# Altium PCB Flyback.PcbDoc (part 1 of 2)
Units mm, origin at the board's own origin, x right, y up, seen from the top; angles counter-clockwise.
Board outline 152.4 x 101.6 mm, 2 copper layers (Top Layer, Bottom Layer), stack 1.671 mm thick; 41 components, 28 nets, 118 pads, 0 vias.
Unrouted connection lines stored in the file: 75.
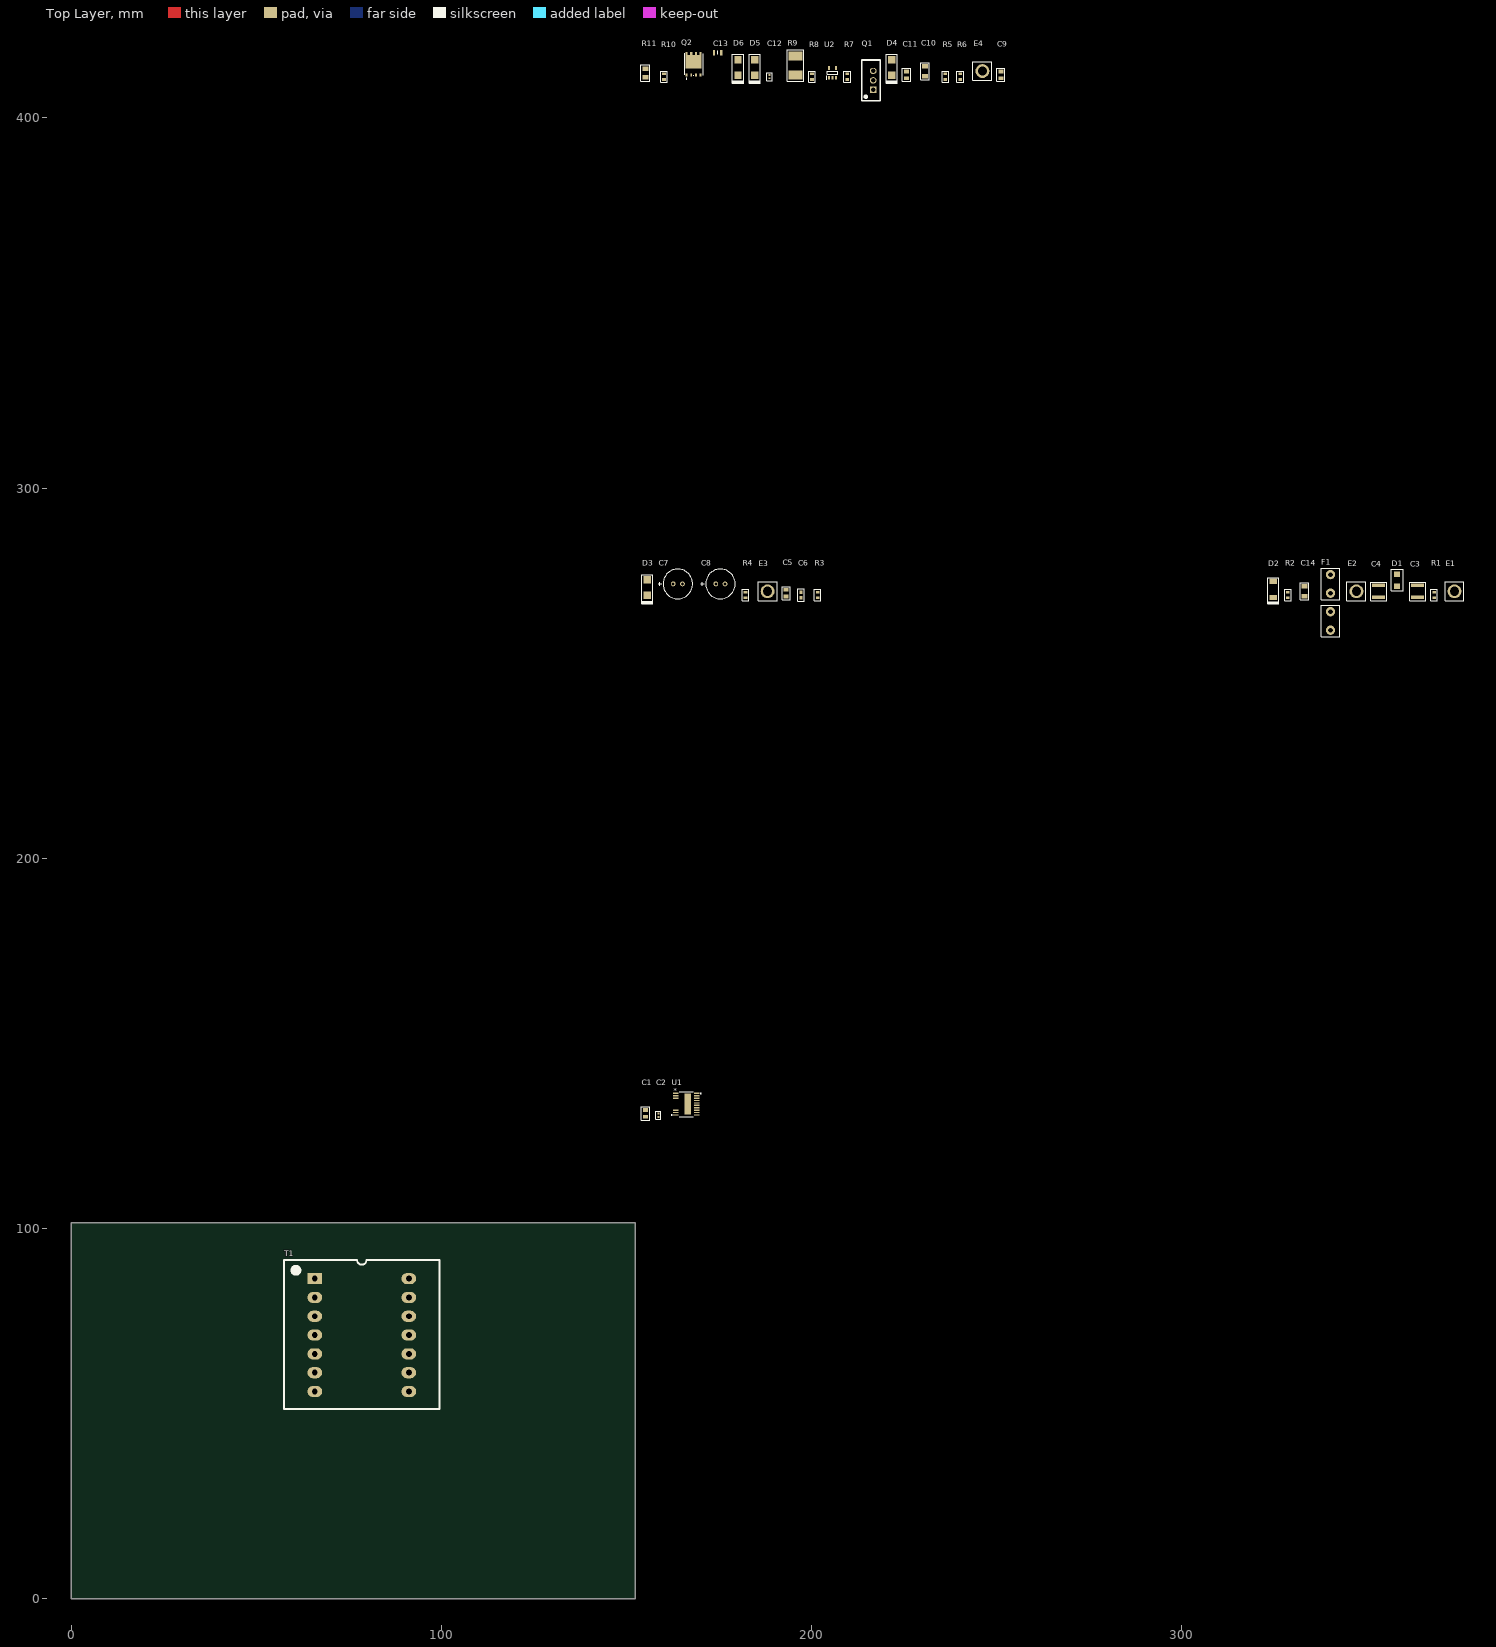
[diagram p0: Top Layer view]
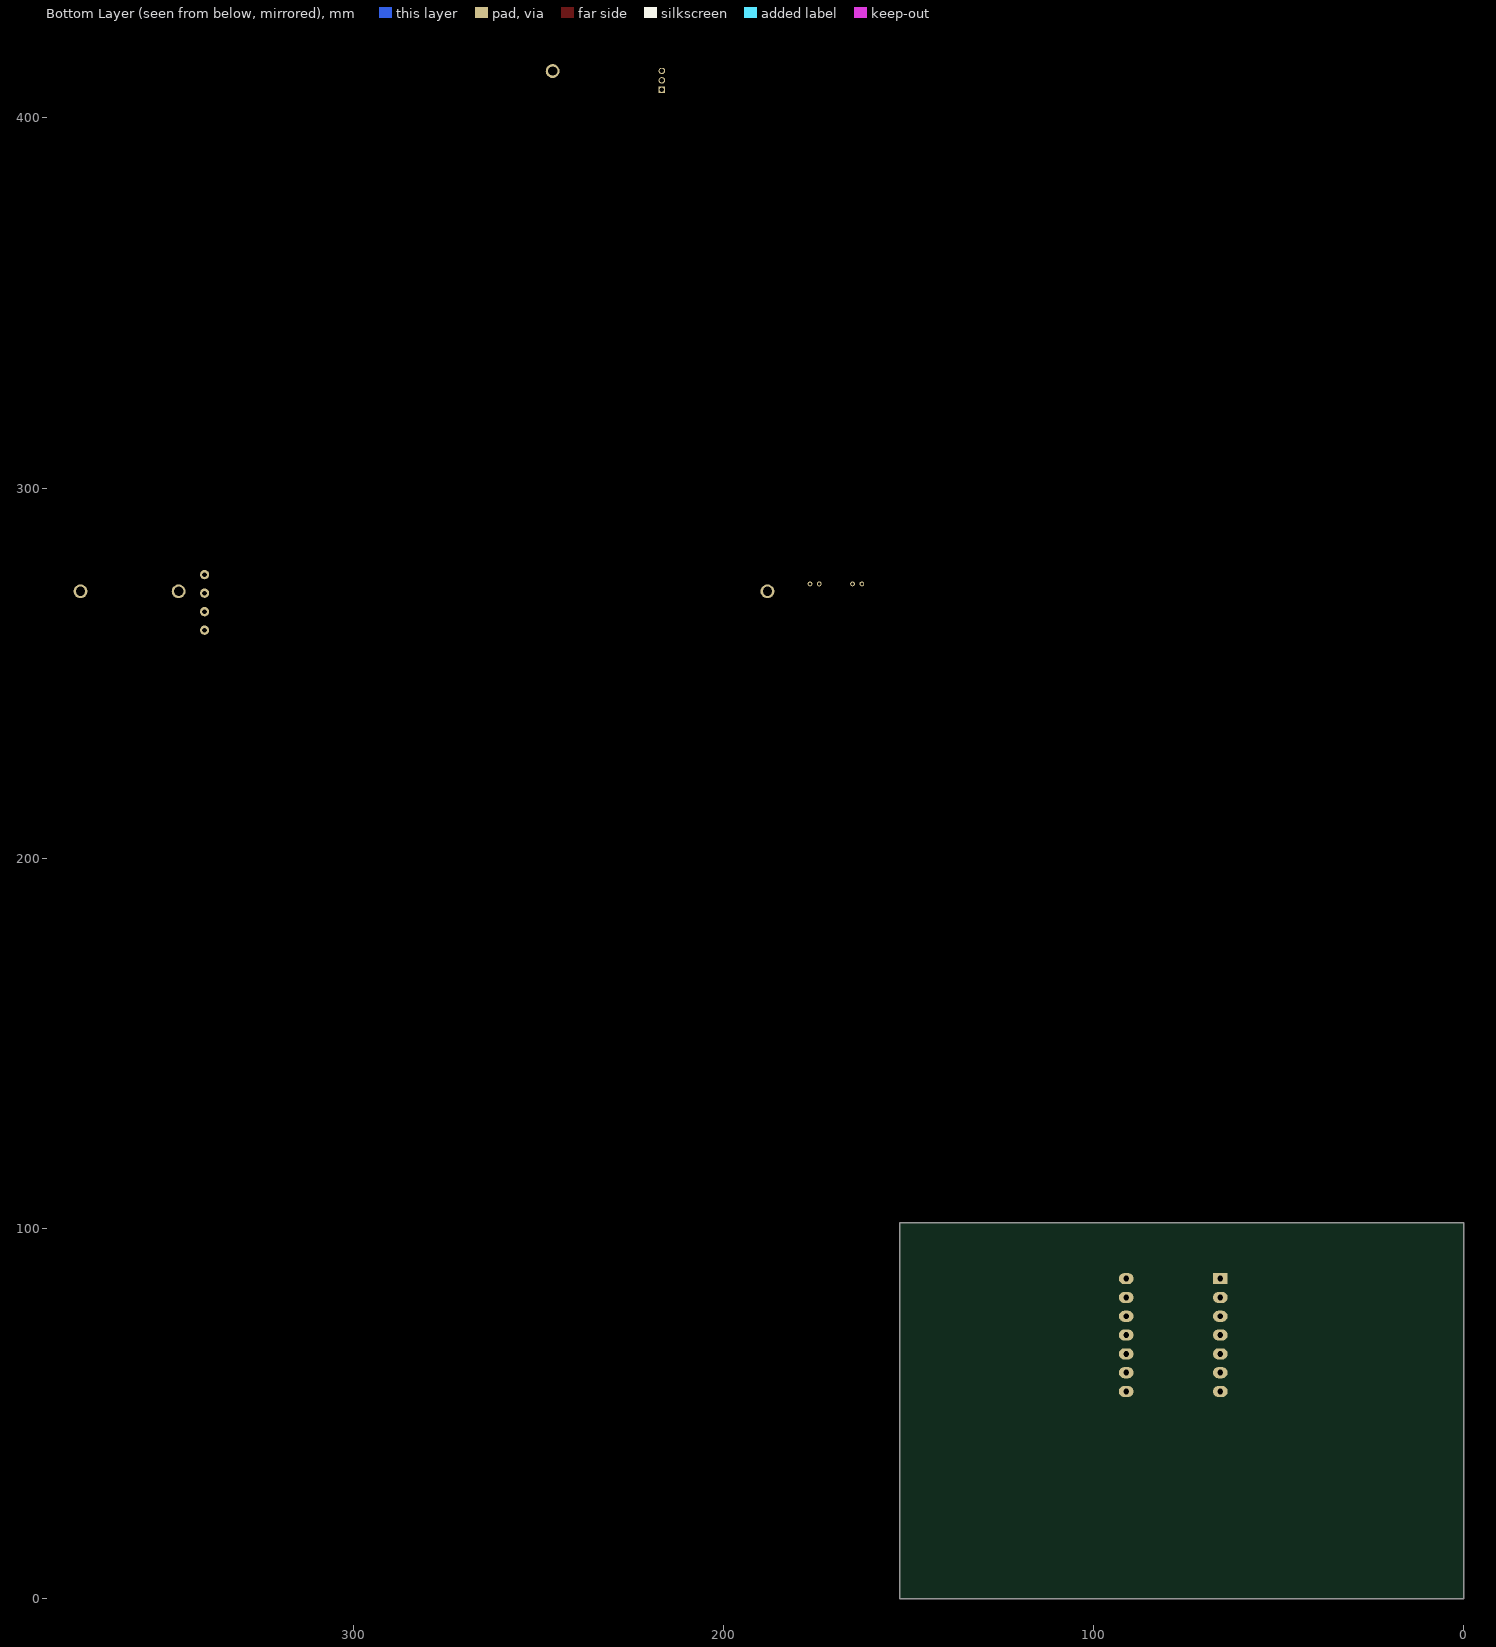
[diagram p1: Bottom Layer view, seen from below]

## Layer stack, top to bottom
Top Solder: solder mask 0.0102, Solder Resist, Dk 3.5
Top Layer: signal copper 0.0356
Dielectric 1: dielectric 1.6, FR-4, Dk 4.8
Bottom Layer: signal copper 0.0356
Bottom Solder: solder mask 0.0102, Solder Resist, Dk 3.5

## Board outline
0,0 152.4,0 152.4,101.6 0,101.6

## Design rules (kind name [scope] priority, off if disabled: settings)
Clearance [All] p1: gap=0.3 ignorepadtopadclearanceinfootprint=FALSE
Height [All] p1: minheight=0 maxheight=35 prefheight=12.7
PolygonConnect [All] p1: connectstyle=Direct reliefconductorwidth=0.254 reliefentries=4 polygonreliefangle="90 Angle" airgapwidth=0.254
RoutingVias [All] p1: holewidth=0.3 width=0.6 viastyle="Through Hole" minholewidth=0.3 minwidth=0.6 maxholewidth=0.3 maxwidth=0.6
SolderMaskExpansion [All] p1: expansion=0.102 istentingtop=FALSE
Width [All] p1: maxlimit=10 minlimit=0.3 preferedwidth=0.5
29 further rules are at their usual default settings.

## Components (designator, comment, footprint, x,y, rotation, side; value= is the part's Value field where it differs from the comment)
C1 "4.7uF" C0805 155.1,131.1 r90 top
C2 "100nF" C0402 158.6,130.6 r90 top
C3 "0.15uF" C1210 363.599,272.099 r90 top
C4 "0.15uF" C1210 353.099,272.099 r90 top
C5 "4.7uF" C0805 193.1,271.599 r90 top
C6 "47pF" C0603 197.1,271.099 r90 top
C7 "470u" C6.3x12 162.6,274.099 r0 top
C8 "470u" C6.3x12 174.1,274.099 r0 top
C9 "10u" C0805 251.099,411.599 r90 top
C10 "100p" C1206 230.599,412.599 r90 top
C11 "1uF" C0805 225.599,411.599 r90 top
C12 "470p" C0402 188.6,411.099 r90 top
C13 "4.7uF" CAPC2012X145N 174.6,417.599 r0 top
C14 "150pF" C1206 333.099,272.099 r90 top
D1 "TVS" D_TVS 358.099,275.099 r90 top
D2 "RB058L150" SOD128 324.599,272.599 r90 top
D3 "3SMAJ5949B" DO214_AC_SMA 155.6,273.099 r90 top
D4 "3SMAJ5949B" DO214_AC_SMA 221.6,413.599 r90 top
D5 "3SMAJ5949B" DO214_AC_SMA 184.6,413.599 r90 top
D6 "RFN1L7S" DO214_AC_SMA 180.1,413.599 r90 top
E1 "VIN+" MILMAX_2501-2-00-80-00-00-07-0 373.599,272.099 r90 top
E2 "VIN-" MILMAX_2501-2-00-80-00-00-07-0 347.099,272.099 r90 top
E3 "VOUT+" MILMAX_2501-2-00-80-00-00-07-0 188.1,272.099 r90 top
E4 "VOUT-" MILMAX_2501-2-00-80-00-00-07-0 246.099,412.599 r90 top
F1 "Fuse" Fuse 340.099,269.099 r90 top
Q1 "IPA70R600P7S" TO220_FullPAK 216.6,410.099 r90 top
Q2 "Sec." BSC040N10NS5ATMA1 168.1,415.099 r0 top
R1 "20k" R0603 368.099,271.099 r90 top
R2 "60.4k" R0603 328.599,271.099 r90 top
R3 "48.7k" R0603 201.6,271.099 r90 top
R4 "9.76k" R0603 182.1,271.099 r90 top
R5 "110k" R0603 236.099,411.099 r90 top
R6 "5.36k" R0603 240.099,411.099 r90 top
R7 "4.7ohm" R0603 209.6,411.099 r90 top
R8 "2.32k" R0603 200.1,411.099 r90 top
R9 "500" R2512 195.6,414.099 r90 top
R10 "50" R0603 160.1,411.099 r90 top
R11 "20m" R1220 155.1,412.099 r90 top
T1 "ETD34" ETD34_COILFORMER 78.5,71.241 r0 top
U1 "U_LT8316EFE#PBF" LT8316EFE 166.1,133.6 r0 top
U2 "LT8309" SOT95P280X100-5N 205.6,412.099 r90 top

## Footprints (in the part's own frame and the unit in brackets; to place one, negate y for a bottom-side part, rotate by r counter-clockwise, add the part's x,y. Pads: shape width x height; smd on the part's side, far side on the other; paste and mask are expansions set on the pad)
BSC040N10NS5ATMA1 [mm]
  rect 0.5x0.925 smd: 1(1.905,-3.561) 3(-1.905,-3.561) 3(-0.635,-3.561) 3(0.635,-3.561)
  rect 0.6x0.8 smd: 2(-1.905,2.227) 2(-0.635,2.227) 2(0.635,2.227) 2(1.905,2.227)
  rect 4.41x3.655 smd: 2(0,0)
  silkscreen extent -2.54,-4.66 2.54,2.28, body extent -2.54,-3.97 2.54,2.57, height 1.3
C6.3x12 [mm]
  round 1.3 hole 0.8: 1(0,0) 2(2.5,0)
  silkscreen extent -4.11,-4 5.25,4, body extent -2.15,-3.4 4.65,3.42, height 13.01
C0402 [mm]
  rect 0.5x0.6 smd: 1(-0.45,0) 2(0.45,0)
  silkscreen extent -1.1,-0.7 1.1,0.7, body extent -0.5,-0.25 0.5,0.25, height 0.56
C0603 [mm]
  rect 0.9x0.9 smd: 1(-0.775,0) 2(0.775,0)
  silkscreen extent -1.7,-0.9 1.7,0.9, body extent -0.8,-0.4 0.8,0.4, height 0.91
C0805 [mm]
  rect 1x1.4 smd: 1(-0.9,0) 2(0.9,0)
  silkscreen extent -1.8,-1.1 1.8,1.1, body extent -1,-0.63 1,0.62, height 0.96
C1206 [mm]
  rect 1.2x1.7 smd: 1(-1.35,0) 2(1.35,0)
  silkscreen extent -2.3,-1.2 2.3,1.2, body extent -1.6,-0.8 1.6,0.8, height 1.01
C1210 [mm]
  rect 1x3.5 smd: 1(-1.6,0) 2(1.6,0)
  silkscreen extent -2.5,-2.2 2.5,2.1, body extent -1.6,-1.25 1.6,1.25, height 2.31
CAPC2012X145N [mm]
  rect 0.62x1.47 smd: 1(-1,0) 2(1,0)
  silkscreen extent 0,-0.53 0,0.53, body extent -1,-0.63 1,0.63, height 1.45
D_TVS [mil]
  rect 60x65 smd: 1(-62.66,0) 2(62.66,0)
  silkscreen extent -114,-63 114,63, body extent -104,-55 104,55, height 92
DO214_AC_SMA [mm]
  rect 2x2 smd: 1(-2.1,0) 2(2.1,0)
  silkscreen extent -4.3,-1.5 3.5,1.5, body extent -2.6,-1.3 2.6,1.3, height 2.42
ETD34_COILFORMER [mm]
  oval 4x3 hole 1.6: 1(-12.7,5.08) 2(-12.7,10.16) 4(-12.7,0) 5(-12.7,-5.08) 6(-12.7,-10.16) 7(-12.7,-15.24) 8(12.7,-15.24) 11(12.7,-10.16) 11(12.7,-5.08) 12(12.7,0) 12(12.7,5.08) 14(12.7,10.16) 14(12.7,15.24)
  rect 4x3 hole 1.6: 3(-12.7,15.24)
  silkscreen extent -21,-20 21,20.28, body extent -20.5,-19.8 20.5,19.8, height 32.91
Fuse [mm]
  round 2.5 hole 1.3: 1(-7.5,0) 1(-2.5,0) 2(2.5,0) 2(7.5,0)
  silkscreen extent -9.25,-2.5 9.25,2.5, body extent -8.1,-2.8 8.1,2.8, height 8.91
LT8316EFE [mm]
  rect 1.461x0.351 smd paste+0 mask+0: 1(-2.825,2.925) 2(-2.825,2.275) 3(-2.825,1.625) 8(-2.825,-1.625) 9(-2.825,-2.275) 10(-2.825,-2.925) 11(2.825,-2.925) 12(2.825,-2.275) 13(2.825,-1.625) 14(2.825,-0.975) 15(2.825,-0.325) 16(2.825,0.325) 17(2.825,0.975) 18(2.825,1.625) 19(2.825,2.275) 20(2.825,2.925)
  rect 1.78x5.68 smd paste-2.827 mask+0: EPAD(0.47,0)
  silkscreen extent -4.06,-3.38 4.06,3.38, body extent -3.2,-3.3 3.2,3.3, height 1.01
MILMAX_2501-2-00-80-00-00-07-0 [mm]
  round 3.74 hole 2.49: 1(0,0)
  silkscreen extent -2.54,-2.54 2.54,2.54, body extent -1.59,-1.59 1.59,1.59, height 5.58
R0603 [mm]
  rect 0.75x1 smd: 1(-0.75,0) 2(0.75,0)
  silkscreen extent -1.5,-0.9 1.5,0.9, body extent -0.8,-0.4 0.8,0.4, height 0.46
R1220 [mm]
  rect 1.3x1.6 smd: 1(-1.15,0) 2(1.15,0)
  silkscreen extent -2.2,-1.2 2.2,1.2, body extent -1.1,-0.72 1.1,0.73, height 0.7
R2512 [mm]
  rect 2.45x3.7 smd: 1(-2.575,0) 2(2.575,0)
  silkscreen extent -4.2,-2.2 4.2,2.2, body extent -3.15,-1.55 3.15,1.55, height 0.61
SOD128 [mm]
  rect 1.4x2 smd: 1(-2.2,0) 2(2.2,0)
  silkscreen extent -3.8,-1.5 3.2,1.5, body extent -2.5,-1.35 2.5,1.35, height 1.12
SOT95P280X100-5N [mm]
  rect 1.05x0.55 smd: 1(-1.3,0.95) 2(-1.3,0) 3(-1.3,-0.95) 4(1.3,-0.95) 5(1.3,0.95)
  silkscreen extent -1.83,-1.45 0.43,1.48, body extent -1.4,-1.45 1.4,1.45, height 1
TO220_FullPAK [mm]
  rect 1.7x1.8 hole 1.2: 1(-2.54,0)
  oval 1.7x1.8 hole 1.2: 2(0,0) 3(2.54,0)
  silkscreen extent -5.5,-1.9 5.5,3.1, body extent -5.08,-1.68 5.08,3.02, height 20.22

## Part data
C1: library part C_IntVcc, "CAP CER 4.7UF 25V X5R 0805 / GRM219R61E475MA73D", Case/Package=0805, Dielectric=X5R, Manufacturer=Murata, Manufacturer Part Number=GRM219R61E475MA73D, Max Operating Temperature=85°C, Min Operating Temperature=-55°C, Supplier Part Number 1=490-14644-1-ND, Tolerance=20%, Voltage Rating=25V, Capacitance=4.7uF, Category="Ceramic Capacitors", ComponentLink1Description=http://search.murata.co.jp/Ceramy/image/img/A01X/G101/ENG/GRM219R61E475MA73-01.pdf?src-supplier=Digi-Key, ComponentLink1URL=http://search.murata.co.jp/Ceramy/image/img/A01X/G101/ENG/GRM219R61E475MA73-01.pdf?src-supplier=Digi-Key, ComponentLink2Description=https://search.murata.co.jp/Ceramy/image/img/A01X/G101/ENG/GRM219R61E475MA73-01.pdf?src-supplier=Digi-Key, ComponentLink2URL=https://search.murata.co.jp/Ceramy/image/img/A01X/G101/ENG/GRM219R61E475MA73-01.pdf?src-supplier=Digi-Key, Length=0.079inch, Mount="Surface Mount", Packaging="Tape and Reel", Pricing 1="1=0,28000, 10=0,19400, 50=0,11640, 100=0,09830, 500=0,06728, 1000=0,05951 (USD)", RoHS=Yes, RoHS Compliant=Yes, Stock 1=107733, Supplier 1=Digi-Key, Thickness=0.037inch, Voltage Rating (DC)=25V, Width=0.049inch
C2: library part C_Vc, "CAP CER 0.1UF 25V X7R 0402 / GRM155R71E104KE14J", Case Code (Imperial)=0402, Case Code (Metric)=1005, Dielectric=X7R, Manufacturer=Murata, Manufacturer Part Number=GRM155R71E104KE14J, Max Operating Temperature=125°C, Min Operating Temperature=-55°C, Package Quantity=50000, Resistor Type=Ceramic, Supplier Part Number 1=490-14603-1-ND, Tolerance=10%, Voltage Rating=25V, Capacitance=100nF, Case/Package=0402, Category=Capacitors, ComponentLink1Description=http://www.mouser.com/ds/2/281/c02e-2905.pdf?src-supplier=Mouser, ComponentLink1URL=http://www.mouser.com/ds/2/281/c02e-2905.pdf?src-supplier=Mouser, ComponentLink2Description=http://search.murata.co.jp/Ceramy/image/img/A01X/G101/ENG/GRM155R71E104KE14-01.pdf?src-supplier=Digi-Key, ComponentLink2URL=http://search.murata.co.jp/Ceramy/image/img/A01X/G101/ENG/GRM155R71E104KE14-01.pdf?src-supplier=Digi-Key, Height=0.5mm, Length=0.039inch, Mount="Surface Mount", Packaging="Tape and Reel", Pricing 1="1=0,10000, 10=0,02800, 50=0,01520, 100=0,01240, 500=0,00886, 1000=0,00696, 2500=0,00632, 5000=0,00582 (USD)", RoHS=Yes, RoHS Compliant=Yes, Stock 1=1830340, Supplier 1=Digi-Key, Termination=SMD/SMT, Thickness=0.022inch, Voltage Rating (DC)=25V, Weight=0.000212oz, Width=0.5mm
C3 C4: library part C_Input, "CAP CER 0.15UF 500V X7R 1210 / C1210C154KCRACTU", Capacitance=150nF, Case Code (Imperial)=1210, Case Code (Metric)=3225, Dielectric=X7R, Dielectric Material=Ceramic, Manufacturer=KEMET, Manufacturer Part Number=C1210C154KCRACTU, Max Operating Temperature=125°C, Min Operating Temperature=-55°C, Supplier Part Number 1=399-13485-1-ND, Tolerance=10%, Voltage Rating=500V, Case/Package=1210, Category="Ceramic Capacitors", ComponentLink1Description=https://api.kemet.com/component-edge/download/datasheet/C1210C154KCRAC7800.pdf?src-supplier=Digi-Key, ComponentLink1URL=https://api.kemet.com/component-edge/download/datasheet/C1210C154KCRAC7800.pdf?src-supplier=Digi-Key, ComponentLink2Description=http://www.kemet.com/docfinder?Partnumber=C1210C154KCRAC7800&src-supplier=Digi-Key, ComponentLink2URL=http://www.kemet.com/docfinder?Partnumber=C1210C154KCRAC7800&src-supplier=Digi-Key, ComponentLink3Description=http://capacitoredge.kemet.com/capedge2/DataSheet/Datasheet-C1210C154KCRACTU.pdf?pn=C1210C154KCRACTU&src-supplier=Avnet, ComponentLink3URL=http://capacitoredge.kemet.com/capedge2/DataSheet/Datasheet-C1210C154KCRACTU.pdf?pn=C1210C154KCRACTU&src-supplier=Avnet, Length=0.126inch, Mount="Surface Mount", Packaging="Tape and Reel", Pricing 1="1=0,49000, 10=0,34400, 50=0,26020, 100=0,22660, 500=0,16786, 1000=0,14268 (USD)", RoHS=Yes, RoHS Compliant=Yes, Stock 1=23364, Supplier 1=Digi-Key, Thickness=0.091inch, Voltage Rating (DC)=500V, Width=0.098inch
C5: library part C_Bias, "CAP CER 4.7UF 35V 10% X5R 0805 / GRM219R6YA475KA73D", Case Code (Imperial)=0805, Case Code (Metric)=2012, Dielectric=X5R, Dielectric Material=Ceramic, Manufacturer=Murata, Manufacturer Part Number=GRM219R6YA475KA73D, Max Operating Temperature=85°C, Min Operating Temperature=-55°C, Package Quantity=1, Supplier Part Number 1=490-7208-1-ND, Tolerance=10%, Voltage=35V, Capacitance=4.7uF, Case/Package=0805, Category="Ceramic Capacitors", ComponentLink1Description=https://datasheet.ciiva.com/14906/partnumbering-e-01-14906486.pdf?src-supplier=Digi-Key, ComponentLink1URL=https://datasheet.ciiva.com/14906/partnumbering-e-01-14906486.pdf?src-supplier=Digi-Key, ComponentLink2Description=https://datasheet.ciiva.com/18697/partnumbering-e-01-18697370.pdf?src-supplier=Digi-Key, ComponentLink2URL=https://datasheet.ciiva.com/18697/partnumbering-e-01-18697370.pdf?src-supplier=Digi-Key, Depth=1.25mm, Height=0.85mm, Lead Free="Lead Free", Length=2mm, Material=Ceramic, Mount="Surface Mount", Packaging="Tape and Reel", Pricing 1="1=0,26000, 10=0,18100, 50=0,12060, 100=0,10250, 500=0,07234, 1000=0,06330 (USD)", RoHS=Yes, RoHS Compliant=Yes, Series=GRM, Stock 1=73735, Supplier 1=Digi-Key, Termination=SMD/SMT, Thickness=0.037inch, Voltage Rating=35V, Voltage Rating (DC)=35V, Weight=0.000335oz, Width=1.25mm
C6: library part C_DCM, "MURATA - GRM1885C2A470JA01D - SMD Multilayer Ceramic Capacitor, 47 pF, 100 V, 0603 [1608 Metric], ± 5%, C0G / NP0, GRM Series", Case Code (Imperial)=0603, Case Code (Metric)=1608, Dielectric=C0G, Manufacturer=Murata, Manufacturer Part Number=GRM1885C2A470JA01D, Max Operating Temperature=125°C, Min Operating Temperature=-55°C, Package Quantity=1, Supplier Part Number 1=490-1343-1-ND, Temperature Coefficient=30ppm/°C, Tolerance=5%, Voltage=100V, Capacitance=47pF, Case/Package=0603, Category=Capacitors, ComponentLink1Description=https://datasheet.ciiva.com/132/product-132289.pdf?src-supplier=Digi-Key, ComponentLink1URL=https://datasheet.ciiva.com/132/product-132289.pdf?src-supplier=Digi-Key, ComponentLink2Description=https://datasheet.ciiva.com/11786/0900766b80ef921d-11786149.pdf?src-supplier=RSComponents, ComponentLink2URL=https://datasheet.ciiva.com/11786/0900766b80ef921d-11786149.pdf?src-supplier=RSComponents, ComponentLink3Description=https://datasheet.ciiva.com/18101/getdatasheetpartid-37998-18101094.pdf?src-supplier=Verical, ComponentLink3URL=https://datasheet.ciiva.com/18101/getdatasheetpartid-37998-18101094.pdf?src-supplier=Verical, ComponentLink4Description=https://datasheet.ciiva.com/29202/451301-da-01-en-vs-kondensator-0603-29202381.pdf?src-supplier=Conrad, ComponentLink4URL=https://datasheet.ciiva.com/29202/451301-da-01-en-vs-kondensator-0603-29202381.pdf?src-supplier=Conrad, ComponentLink5Description=https://datasheet.ciiva.com/132/partnumbering-e-01-132290.pdf?src-supplier=Digi-Key, ComponentLink5URL=https://datasheet.ciiva.com/132/partnumbering-e-01-132290.pdf?src-supplier=Digi-Key, ComponentLink6Description=https://datasheet.ciiva.com/132/partnumbering-e-01-132291.pdf?src-supplier=Digi-Key, ComponentLink6URL=https://datasheet.ciiva.com/132/partnumbering-e-01-132291.pdf?src-supplier=Digi-Key, ComponentLink7Description=https://datasheet.ciiva.com/5424/product-5424681.pdf?src-supplier=Mouser, ComponentLink7URL=https://datasheet.ciiva.com/5424/product-5424681.pdf?src-supplier=Mouser, ComponentLink8Description=https://datasheet.ciiva.com/11463/product-11463932.pdf?src-supplier=Avnet, ComponentLink8URL=https://datasheet.ciiva.com/11463/product-11463932.pdf?src-supplier=Avnet, ComponentLink9Description=https://datasheet.ciiva.com/16497/product-16497070.pdf?src-supplier=Future+Electronics, ComponentLink9URL=https://datasheet.ciiva.com/16497/product-16497070.pdf?src-supplier=Future+Electronics, Construction=Flat, Depth=0.8mm, Height=0.8mm, Lead Free="Lead Free", Length=1.6mm, Material=Ceramic, Mount="Surface Mount", Packaging="Tape and Reel", Pricing 1="1=0,11000, 10=0,07600, 50=0,04340, 100=0,03590, 500=0,02516, 1000=0,02083 (USD)", Radiation Hardening=No, REACH SVHC="No SVHC", RoHS=Yes, RoHS Compliant=Yes, Series=GRM, Stock 1=150902, Supplier 1=Digi-Key, Termination=SMD/SMT, Thickness=0.035inch, Voltage Rating=100V, Voltage Rating (DC)=100V, Width=0.031inch
C7 C8: library part C_OUT_470u, "Solid Polymer Aluminum, Radial, Output Capacitor / A750EQ477M1CAAE015", Manufacturer=KEMET, Manufacturer Part Number=A750EQ477M1CAAE015, Supplier Part Number 1=399-A750EQ477M1CAAE015-ND, Pricing 1="1=0,53000, 10=0,37700, 50=0,28520, 100=0,24840, 500=0,18400, 1000=0,15640, 2500=0,14720, 5000=0,13800 (USD)", Stock 1=1592, Supplier 1=Digi-Key
C9: library part C_OUT_10u, "MURATA - GRM21BR61E106MA73L - SMD Multilayer Ceramic Capacitor, 10 µF, 25 V, 0805 [2012 Metric], ± 20%, X5R, GRM Series", Capacitance=10uF, Case Code (Imperial)=0805, Case Code (Metric)=2012, Dielectric=X5R, Manufacturer=Murata, Manufacturer Part Number=GRM21BR61E106MA73L, Max Operating Temperature=85°C, Min Operating Temperature=-55°C, Package Quantity=3000, Resistor Type=Ceramic, Supplier Part Number 1=490-10748-1-ND, Tolerance=20%, Voltage Rating=25V, Case/Package=0805, Category="Ceramic Capacitors", ComponentLink1Description=http://www.farnell.com/datasheets/2079185.pdf?src-supplier=Farnell, ComponentLink1URL=http://www.farnell.com/datasheets/2079185.pdf?src-supplier=Farnell, ComponentLink2Description=http://www.mouser.com/ds/2/281/c02e-2905.pdf?src-supplier=Mouser, ComponentLink2URL=http://www.mouser.com/ds/2/281/c02e-2905.pdf?src-supplier=Mouser, ComponentLink3Description=http://components.arrow.com/part/dataview/0323_03061623?src-supplier=Arrow+Europe, ComponentLink3URL=http://components.arrow.com/part/dataview/0323_03061623?src-supplier=Arrow+Europe, ComponentLink4Description=https://search.murata.co.jp/Ceramy/image/img/A01X/G101/ENG/GRM21BR61E106MA73-01.pdf?src-supplier=Digi-Key, ComponentLink4URL=https://search.murata.co.jp/Ceramy/image/img/A01X/G101/ENG/GRM21BR61E106MA73-01.pdf?src-supplier=Digi-Key, ComponentLink5Description=http://www.farnell.com/datasheets/2079185.pdf?src-supplier=Element14, ComponentLink5URL=http://www.farnell.com/datasheets/2079185.pdf?src-supplier=Element14, Depth=1.25mm, Height=1.25mm, Lead Free="Lead Free", Length=2mm, Mount="Surface Mount", Packaging="Tape and Reel", Pricing 1="1=0,26000, 10=0,17900, 50=0,11960, 100=0,10170, 500=0,07176, 1000=0,06279 (USD)", REACH SVHC="No SVHC", RoHS=Yes, RoHS Compliant=Yes, Stock 1=350987, Supplier 1=Digi-Key, Termination=SMD/SMT, Thickness=0.055inch, Voltage Rating (DC)=25V, Weight=0.000335oz, Width=0.049inch
C10: library part C_Snub_Pri, "CAP CER 100PF 630V C0G/NP0 1206 / GRM31A5C2J101JW01D", Capacitance=100pF, Case Code (Imperial)=1206, Case Code (Metric)=3216, Dielectric=C0G, Manufacturer=Murata, Manufacturer Part Number=GRM31A5C2J101JW01D, Max Operating Temperature=125°C, Min Operating Temperature=-55°C, Package Quantity=1, Supplier Part Number 1=490-5273-1-ND, Temperature Coefficient=30ppm/°C, Tolerance=10%, Voltage=500V, Voltage Rating=630V, Case/Package=1206, Category="Ceramic Capacitors", ComponentLink1Description=https://datasheet.ciiva.com/6173/608985-6173110.pdf?src-supplier=Farnell, ComponentLink1URL=https://datasheet.ciiva.com/6173/608985-6173110.pdf?src-supplier=Farnell, ComponentLink2Description=https://datasheet.ciiva.com/22703/608985-22703466.pdf?src-supplier=Element14, ComponentLink2URL=https://datasheet.ciiva.com/22703/608985-22703466.pdf?src-supplier=Element14, ComponentLink3Description=https://datasheet.ciiva.com/138/partnumbering-e-01-138811.pdf?src-supplier=Digi-Key, ComponentLink3URL=https://datasheet.ciiva.com/138/partnumbering-e-01-138811.pdf?src-supplier=Digi-Key, ComponentLink4Description=https://datasheet.ciiva.com/138/partnumbering-e-01-138812.pdf?src-supplier=Digi-Key, ComponentLink4URL=https://datasheet.ciiva.com/138/partnumbering-e-01-138812.pdf?src-supplier=Digi-Key, ComponentLink5Description=https://datasheet.ciiva.com/138/partnumbering-e-01-138813.pdf?src-supplier=Digi-Key, ComponentLink5URL=https://datasheet.ciiva.com/138/partnumbering-e-01-138813.pdf?src-supplier=Digi-Key, ComponentLink6Description=https://datasheet.ciiva.com/16214/product-16214765.pdf?src-supplier=Future+Electronics, ComponentLink6URL=https://datasheet.ciiva.com/16214/product-16214765.pdf?src-supplier=Future+Electronics, Construction=Flat, Depth=1.6mm, Height=1mm, Lead Free="Lead Free", Length=3.2mm, Mount="Surface Mount", Packaging="Tape and Reel", Pricing 1="1=0,48000, 10=0,33300, 50=0,23340, 100=0,20000, 500=0,14998, 1000=0,12665 (USD)", Radiation Hardening=No, REACH SVHC="No SVHC", RoHS=Yes, RoHS Compliant=Yes, Series=GRM, Stock 1=140494, Supplier 1=Digi-Key, Termination=SMD/SMT, Thickness=0.039inch, Voltage Rating (DC)=630V, Width=1.6mm
C11: library part C_Vcc2, "Cap Ceramic 1uF 16V X5R 10% SMD 1206 85°C T/R", Case/Package=1206, Manufacturer=KEMET, Manufacturer Part Number=C1206C105K4PAC7800, Max Operating Temperature=85°C, Min Operating Temperature=-55°C, Supplier Part Number 1=399-15074-1-ND, Tolerance=10%, Voltage Rating=16V, Capacitance=1uF, Category="Ceramic Capacitors", ComponentLink1Description=https://api.kemet.com/component-edge/download/datasheet/C1206C105K4PAC7800.pdf?src-supplier=Digi-Key, ComponentLink1URL=https://api.kemet.com/component-edge/download/datasheet/C1206C105K4PAC7800.pdf?src-supplier=Digi-Key, Mount="Surface Mount", Packaging="Tape and Reel", Pricing 1="1=0,50000, 10=0,35400, 50=0,26740, 100=0,23290, 500=0,17250, 1000=0,14662 (USD)", RoHS=Yes, RoHS Compliant=Yes, Stock 1=698, Supplier 1=Digi-Key
C12: library part C_Snub_Sec, "Cap Ceramic 470pF 100V X7R 10% SMD 0402 125C Paper T/R / GRM155R72A471KA01D", Capacitance=470pF, Case Code (Imperial)=0402, Case Code (Metric)=1005, Dielectric=X7R, Manufacturer=Murata, Manufacturer Part Number=GRM155R72A471KA01D, Max Operating Temperature=125°C, Min Operating Temperature=-55°C, Package Quantity=10000, Supplier Part Number 1=490-6369-1-ND, Tolerance=10%, Voltage=100V, Case/Package=0402, Category="Ceramic Capacitors", ComponentLink1Description=https://datasheet.ciiva.com/6263/product-6263842.pdf?src-supplier=Digi-Key, ComponentLink1URL=https://datasheet.ciiva.com/6263/product-6263842.pdf?src-supplier=Digi-Key, ComponentLink2Description=https://datasheet.ciiva.com/6263/partnumbering-e-01-6263846.pdf?src-supplier=Digi-Key, ComponentLink2URL=https://datasheet.ciiva.com/6263/partnumbering-e-01-6263846.pdf?src-supplier=Digi-Key, ComponentLink3Description=https://datasheet.ciiva.com/11604/product-11604842.pdf?src-supplier=Avnet, ComponentLink3URL=https://datasheet.ciiva.com/11604/product-11604842.pdf?src-supplier=Avnet, Construction=Flat, Depth=0.5mm, Height=0.5mm, Lead Free="Lead Free", Length=1mm, Mount="Surface Mount", Packaging="Tape and Reel", Pricing 1="1=0,10000, 10=0,05300, 50=0,02900, 100=0,02370, 500=0,01690, 1000=0,01328, 2500=0,01208, 5000=0,01111 (USD)", Radiation Hardening=No, RoHS=Yes, RoHS Compliant=Yes, Series=GRM, Stock 1=9964, Supplier 1=Digi-Key, Termination=SMD/SMT, Thickness=0.022inch, Voltage Rating=100V, Voltage Rating (DC)=100V, Width=0.02inch
C13: library part C_IntVcc2, "4.7µF ±10% 10V X7R Ceramic Capacitor -55°C ~ 125°C Surface Mount, MLCC 0805 (2012 Metric) 0.079\" L x 0.049\" W (2.00mm x 1.25mm)", Case Code (Imperial)=0805, Case Code (Metric)=2012, Dielectric=X7R, Manufacturer=TDK, Manufacturer Part Number=CGA4J3X7R1A475K125AB, Max Operating Temperature=125°C, Min Operating Temperature=-55°C, Package Quantity=2000, Ratings=AEC-Q200, Supplier Part Number 1=445-12730-1-ND, Tolerance=10%, Voltage Rating=10V, Capacitance=4.7uF, Case/Package=0805, Category="Ceramic Capacitors", ComponentLink1Description=http://www.mouser.com/ds/2/400/lcc_automotive_general_en-843974.pdf?src-supplier=Mouser, ComponentLink1URL=http://www.mouser.com/ds/2/400/lcc_automotive_general_en-843974.pdf?src-supplier=Mouser, ComponentLink2Description=http://www.farnell.com/datasheets/2016103.pdf?src-supplier=Farnell, ComponentLink2URL=http://www.farnell.com/datasheets/2016103.pdf?src-supplier=Farnell, ComponentLink3Description=http://www.farnell.com/datasheets/2016103.pdf?src-supplier=Element14, ComponentLink3URL=http://www.farnell.com/datasheets/2016103.pdf?src-supplier=Element14, ComponentLink4Description=http://product.tdk.com/en/catalog/datasheets/mlcc_automotive_general_en.pdf?src-supplier=Avnet, ComponentLink4URL=http://product.tdk.com/en/catalog/datasheets/mlcc_automotive_general_en.pdf?src-supplier=Avnet, ComponentLink5Description=https://product.tdk.com/info/en/documents/chara_sheet/CGA4J3X7R1A475K125AB.pdf?src-supplier=Digi-Key, ComponentLink5URL=https://product.tdk.com/info/en/documents/chara_sheet/CGA4J3X7R1A475K125AB.pdf?src-supplier=Digi-Key, ComponentLink6Description=https://product.tdk.com/info/en/catalog/datasheets/mlcc_automotive_general_en.pdf?src-supplier=Digi-Key, ComponentLink6URL=https://product.tdk.com/info/en/catalog/datasheets/mlcc_automotive_general_en.pdf?src-supplier=Digi-Key, Height=1.25mm, Lead Free="Lead Free", Length=0.079inch, Mount="Surface Mount", Packaging="Tape and Reel", Pricing 1="1=0,27000, 10=0,18200, 50=0,12140, 100=0,10320, 500=0,07286, 1000=0,06376 (USD)", REACH SVHC="No SVHC", RoHS=Yes, Stock 1=263, Supplier 1=Digi-Key, Termination=SMD/SMT, Thickness=0.057inch, Voltage Rating (DC)=10V, Weight=0.000194oz, Width=1.25mm
C14: library part C_Ground, "Cap Ceramic 150pF 1000V C0G 5% SMD 1206 125°C Paper T/R / GRM31A5C3A151JW01D", Case Code (Imperial)=1206, Case Code (Metric)=3216, Dielectric=C0G, Manufacturer=Murata, Manufacturer Part Number=GRM31A5C3A151JW01D, Max Operating Temperature=125°C, Min Operating Temperature=-55°C, Package Quantity=4000, Resistor Type=Ceramic, Supplier Part Number 1=490-13376-1-ND, Tolerance=5%, Voltage Rating=1kV, Capacitance=150pF, Case/Package=1206, Category="Ceramic Capacitors", ComponentLink1Description=http://www.mouser.com/ds/2/281/c02e-2905.pdf?src-supplier=Mouser, ComponentLink1URL=http://www.mouser.com/ds/2/281/c02e-2905.pdf?src-supplier=Mouser, ComponentLink2Description=http://search.murata.co.jp/Ceramy/image/img/A01X/partnumbering_e_01.pdf?src-supplier=Digi-Key, ComponentLink2URL=http://search.murata.co.jp/Ceramy/image/img/A01X/partnumbering_e_01.pdf?src-supplier=Digi-Key, Height=1mm, Length=0.126inch, Mount="Surface Mount", Packaging="Tape and Reel", Pricing 1="1=0,40000, 10=0,27900, 50=0,19520, 100=0,16730, 500=0,12550, 1000=0,10597 (USD)", RoHS=Yes, RoHS Compliant=Yes, Stock 1=7870, Supplier 1=Digi-Key, Termination=SMD/SMT, Thickness=0.051inch, Voltage Rating (DC)=1kV, Weight=0.001411oz, Width=1.6mm
D1: library part D_P4SMA440CA, "TVS DIODE 376VWM 602VC SMD", Breakdown Voltage=418V, Case/Package=DO-214AC, Clamping Voltage=602V, Leakage Current=5uA, Manufacturer=Littelfuse, Manufacturer Part Number=P4SMA440CA, Max Breakdown Voltage=462V, Max Operating Temperature=150°C, Max Power Dissipation=3.3W, Max Surge Current=700mA, Min Operating Temperature=-65°C, Operating Supply Voltage=376V, Package Quantity=5000, Peak Pulse Power=400W, Power Line Protection=No, Resistor Type=Zener, Supplier Part Number 1=P4SMA440CACT-ND, Test Current=1mA, Voltage Rating (DC)=440V, Category="TVS Diodes", Clamping Voltage-Max=602V, ComponentLink1Description=https://datasheet.ciiva.com/16473/littelfuse-tvs-diodes-p4sma-16473648.pdf?src-supplier=Future+Electronics, ComponentLink1URL=https://datasheet.ciiva.com/16473/littelfuse-tvs-diodes-p4sma-16473648.pdf?src-supplier=Future+Electronics, ComponentLink2Description=https://datasheet.ciiva.com/341/littelfuse-tvs-diode-p4sma-datasheet-pdf-341159.pdf?src-supplier=Digi-Key, ComponentLink2URL=https://datasheet.ciiva.com/341/littelfuse-tvs-diode-p4sma-datasheet-pdf-341159.pdf?src-supplier=Digi-Key, ComponentLink3Description=https://datasheet.ciiva.com/8062/littelfuse-tvs-diodes-p4sma-8062188.pdf?src-supplier=Element14, ComponentLink3URL=https://datasheet.ciiva.com/8062/littelfuse-tvs-diodes-p4sma-8062188.pdf?src-supplier=Element14, ComponentLink4Description=https://datasheet.ciiva.com/341/littelfuse-tvs-diode-p4sma-datasheet-pdf-341160.pdf?src-supplier=Digi-Key, ComponentLink4URL=https://datasheet.ciiva.com/341/littelfuse-tvs-diode-p4sma-datasheet-pdf-341160.pdf?src-supplier=Digi-Key, Diode Type=ZENER, Direction=Bidirectional, Height=2.29mm, Lead Free="Lead Free", Length=5.28mm, Min Breakdown Voltage=418V, Mount="Surface Mount", Number of Bidirectional Channels=1, Number of Channels=1, Number of Elements=1, Number of Pins=2, Packaging="Tape and Reel", Peak Pulse Current=700mA, Polarity=Bidirectional, Power Dissipation=400W, Pricing 1="1=0,61000, 10=0,53500, 100=0,41040, 500=0,32444, 1000=0,25955, 2000=0,23522 (USD)", REACH SVHC=Unknown, Reverse Breakdown Voltage=418V, Reverse Standoff Voltage=376V, RoHS=Yes, RoHS Compliant=Yes, Series=P4SMA, Stock 1=2778, Supplier 1=Digi-Key, Termination=SMD/SMT, Width=2.79mm
D2: library part D_RB058LAM150TR, "Schottky Barrier Diode for general rectification Diode for Bias Pin", Manufacturer=Rohm, Manufacturer Part Number=RB058LAM150TR, Supplier Part Number 1=RB058LAM150CT-ND, ComponentLink1Description=http://www.farnell.com/datasheets/2646192.pdf?src-supplier=Farnell, ComponentLink1URL=http://www.farnell.com/datasheets/2646192.pdf?src-supplier=Farnell, ComponentLink2Description=http://www.farnell.com/datasheets/2646192.pdf?src-supplier=Element14, ComponentLink2URL=http://www.farnell.com/datasheets/2646192.pdf?src-supplier=Element14, ComponentLink3Description=http://www.farnell.com/datasheets/2646192.pdf?src-supplier=Newark, ComponentLink3URL=http://www.farnell.com/datasheets/2646192.pdf?src-supplier=Newark, Pricing 1="1=0,45000, 10=0,34000, 100=0,21190, 500=0,14500, 1000=0,11154 (USD)", RoHS=Yes, RoHS Compliant=Yes, Stock 1=50, Supplier 1=Digi-Key
D3 D4 D5: library part D_3SMAJ5949B-TP, "DIODE ZENER 100V 3W DO214AC / 3SMAJ5949B-TPMSCT-ND", Manufacturer=MCC, Manufacturer Part Number=3SMAJ5949B-TP, Max Operating Temperature=150°C, Max Power Dissipation=3W, Min Operating Temperature=-55°C, Package Quantity=1, Supplier Part Number 1=3SMAJ5949B-TPMSCT-ND, Tolerance=5%, Zener Voltage=100V, Category="Zener Diodes", ComponentLink1Description=https://datasheet.ciiva.com/6389/3smaj5913b3smaj5956bdo-214ac-6389951.pdf?src-supplier=Digi-Key, ComponentLink1URL=https://datasheet.ciiva.com/6389/3smaj5913b3smaj5956bdo-214ac-6389951.pdf?src-supplier=Digi-Key, ComponentLink2Description=https://datasheet.ciiva.com/6389/3smaj5913b3smaj5956bdo-214ac-6389949.pdf?src-supplier=Digi-Key, ComponentLink2URL=https://datasheet.ciiva.com/6389/3smaj5913b3smaj5956bdo-214ac-6389949.pdf?src-supplier=Digi-Key, ComponentLink3Description=https://datasheet.ciiva.com/6389/3smaj5913b3smaj5956bdo-214ac-6389950.pdf?src-supplier=Digi-Key, ComponentLink3URL=https://datasheet.ciiva.com/6389/3smaj5913b3smaj5956bdo-214ac-6389950.pdf?src-supplier=Digi-Key, Impedance=250R, Mount="Surface Mount", Packaging="Tape and Reel", Pricing 1="1=0,51000, 10=0,41400, 100=0,28160, 500=0,21120, 1000=0,15840, 2000=0,14520 (USD)", RoHS=Yes, RoHS Compliant=Yes, Series=3SMAJ594, Stock 1=860, Supplier 1=Digi-Key
D6: library part D_RFN1L7SDDTE25, "Clamp circuit fast diode", Manufacturer=Rohm, Manufacturer Part Number=RFN1L7SDDTE25, Supplier Part Number 1=846-RFN1L7SDDTE25TR-ND, RoHS=Yes, Supplier 1=Digi-Key
E1 E2 E3 E4: library part Connector, "TERM TURRET SINGLE L=5.56MM TIN / 2501-2-00-80-00-00-07-0", Manufacturer=Mill-Max, Manufacturer Part Number=2501-2-00-80-00-00-07-0, Package Quantity=500, Supplier Part Number 1=ED90581-ND, Board Thickness=1.57mm, Category=Terminals, ComponentLink1Description=https://datasheet.ciiva.com/12487/2501-2-00-80-00-00-07-0-89719-12487471.pdf?src-supplier=Mouser, ComponentLink1URL=https://datasheet.ciiva.com/12487/2501-2-00-80-00-00-07-0-89719-12487471.pdf?src-supplier=Mouser, Gender=Male, Hole Diameter=0.094inch, Lead Free="Lead Free", Length=0.328inch, Material=Brass, Mount="Through Hole", Mounting Hole Diameter=2.39mm, Outside Diameter=3.18mm, Packaging=Bulk, Pin Diameter=0.047inch, Plating=Tin, Pricing 1="1=0,23000, 10=0,21400, 25=0,18240, 50=0,15940, 100=0,14810, 250=0,13100, 500=0,12530, 1000=0,10252, 2500=0,09397 (USD)", RoHS=Yes, RoHS Compliant=Yes, Stock 1=4209, Supplier 1=Digi-Key
F1: library part Fuse_0751.0110, "FUSE CLIP CARTRIDGE 10A PCB / 0751.0110", Color=Silver, Current Rating=6.3A, Manufacturer=Schurter, Manufacturer Part Number=0751.0110, Max Operating Temperature=85°C, Min Operating Temperature=-40°C, Package Quantity=1000, Supplier Part Number 1=486-2019-ND, Voltage=500V, Voltage Rating=250V, Body Material=Brass, Category="Fuse Holders", ComponentLink1Description=https://datasheet.ciiva.com/16216/629typ-og-clip-5x20-16216705.pdf?src-supplier=Onlinecomponents.com, ComponentLink1URL=https://datasheet.ciiva.com/16216/629typ-og-clip-5x20-16216705.pdf?src-supplier=Onlinecomponents.com, ComponentLink2Description=https://datasheet.ciiva.com/26828/getdatasheetpartid-474345-26828915.pdf?src-supplier=Verical, ComponentLink2URL=https://datasheet.ciiva.com/26828/getdatasheetpartid-474345-26828915.pdf?src-supplier=Verical, ComponentLink3Description=https://datasheet.ciiva.com/14102/zoog-clip-5x20-e-14102795.pdf?src-supplier=Distrelec, ComponentLink3URL=https://datasheet.ciiva.com/14102/zoog-clip-5x20-e-14102795.pdf?src-supplier=Distrelec, ComponentLink4Description=https://datasheet.ciiva.com/30148/54typ-og-clip-5x20-30148507.pdf?src-supplier=Onlinecomponents.com, ComponentLink4URL=https://datasheet.ciiva.com/30148/54typ-og-clip-5x20-30148507.pdf?src-supplier=Onlinecomponents.com, ComponentLink5Description=https://datasheet.ciiva.com/4480/typ-og-clip-5x20-4480442.pdf?src-supplier=Mouser, ComponentLink5URL=https://datasheet.ciiva.com/4480/typ-og-clip-5x20-4480442.pdf?src-supplier=Mouser, ComponentLink6Description=https://datasheet.ciiva.com/3014/typ-og-clip-5x20-3014524.pdf?src-supplier=Avnet, ComponentLink6URL=https://datasheet.ciiva.com/3014/typ-og-clip-5x20-3014524.pdf?src-supplier=Avnet, ComponentLink7Description=https://datasheet.ciiva.com/8036/1712870-8036524.pdf?src-supplier=Element14, ComponentLink7URL=https://datasheet.ciiva.com/8036/1712870-8036524.pdf?src-supplier=Element14, ComponentLink8Description=https://datasheet.ciiva.com/16535/typ-og-clip-5x20-16535885.pdf?src-supplier=Avnet+Europe, ComponentLink8URL=https://datasheet.ciiva.com/16535/typ-og-clip-5x20-16535885.pdf?src-supplier=Avnet+Europe, ComponentLink9Description=https://datasheet.ciiva.com/16326/typ-og-clip-5x20-16326863.pdf?src-supplier=Future+Electronics, ComponentLink9URL=https://datasheet.ciiva.com/16326/typ-og-clip-5x20-16326863.pdf?src-supplier=Future+Electronics, Contact Material=Brass, Contact Plating=Tin, Depth=5mm, Fuse Current=6.3A, Height=8.9mm, Lead Free="Lead Free", Length=5.6mm, Material=Bronze,Tin,Brass, Mount="Horizontal,PCB,Through Hole", Number of Circuits=1, Orientation=Horizontal, Packaging=Bulk, Pricing 1="1=0,14000, 50=0,10800, 100=0,09700, 500=0,07300, 1000=0,06384 (USD)", Radiation Hardening=No, REACH SVHC="No SVHC", RoHS=Yes, Stock 1=21388, Supplier 1=Digi-Key, Termination="PC Pin", Voltage Rating (AC)=500V, Voltage Rating (DC)=500V, Weight=0.011288oz, Width=5.6mm
Q1: library part Q_IPA70R600P7SXKSA1, "Single N-Channel 700V 600 mOhm 10.5 nC CoolMOS Power Mosfet - TO-220-3FP", Case/Package=TO-220-3, Continuous Drain Current (ID)=8.5A, Drain to Source Voltage (Vdss)=700V, Input Capacitance=364pF, Manufacturer=Infineon, Manufacturer Part Number=IPA70R600P7SXKSA1, Max Operating Temperature=150°C, Max Power Dissipation=25W, Min Operating Temperature=-40°C, Supplier Part Number 1=IPA70R600P7SXKSA1-ND, Category=MOSFETs, ComponentLink1Description=https://www.infineon.com/dgdl/Infineon-IPA70R600P7S-DS-v02_00-EN.pdf?fileId=5546d462584d1d4a0158cf80e8880d96&src-supplier=Digi-Key, ComponentLink1URL=https://www.infineon.com/dgdl/Infineon-IPA70R600P7S-DS-v02_00-EN.pdf?fileId=5546d462584d1d4a0158cf80e8880d96&src-supplier=Digi-Key, Halogen Free="Halogen Free", Lead Free="Lead Free", Max Dual Supply Voltage=700V, Mount="Through Hole", Packaging=Rail/Tube, Pricing 1="1=1,03000, 10=0,91700, 25=0,87000, 100=0,71470, 500=0,59038, 1000=0,47285 (USD)", Rds On Max=600mR, RoHS=Yes, RoHS Compliant=Yes, Stock 1=111, Supplier 1=Digi-Key
Q2: library part Q_BSC040N10NS5ATMA1, "INFINEON - BSC040N10NS5ATMA1 - MOSFET, N-KANAL, 100V, 100A, TDSON", Continuous Drain Current (ID)=100A, Drain to Source Breakdown Voltage=100V, Drain to Source Resistance=5.6mR, Gate to Source Voltage (Vgs)=20V, Input Capacitance=5.3nF, Manufacturer=Infineon, Manufacturer Part Number=BSC040N10NS5ATMA1, Max Operating Temperature=150°C, Max Power Dissipation=2.5W, Min Operating Temperature=-55°C, Package Quantity=5000, Supplier Part Number 1=BSC040N10NS5ATMA1CT-ND, Category=MOSFETs, ComponentLink1Description=http://www.mouser.com/ds/2/196/Infineon-BSC040N10NS5-DS-v02_01-EN-531313.pdf?src-supplier=Mouser, ComponentLink1URL=http://www.mouser.com/ds/2/196/Infineon-BSC040N10NS5-DS-v02_01-EN-531313.pdf?src-supplier=Mouser, ComponentLink2Description=http://www.farnell.com/datasheets/2211525.pdf?src-supplier=Farnell, ComponentLink2URL=http://www.farnell.com/datasheets/2211525.pdf?src-supplier=Farnell, ComponentLink3Description=https://www.infineon.com/dgdl/Infineon-BSC040N10NS5-DS-v02_01-EN.pdf?fileId=5546d4624a0bf290014a0fbcee2e6b38&src-supplier=Digi-Key, ComponentLink3URL=https://www.infineon.com/dgdl/Infineon-BSC040N10NS5-DS-v02_01-EN.pdf?fileId=5546d4624a0bf290014a0fbcee2e6b38&src-supplier=Digi-Key, ComponentLink4Description=http://www.infineon.com/dgdl/Infineon-BSC040N10NS5-DS-v02_01-EN.pdf?fileId=5546d4624a0bf290014a0fbcee2e6b38&src-supplier=Digi-Key, ComponentLink4URL=http://www.infineon.com/dgdl/Infineon-BSC040N10NS5-DS-v02_01-EN.pdf?fileId=5546d4624a0bf290014a0fbcee2e6b38&src-supplier=Digi-Key, ComponentLink5Description=http://www.infineon.com/dgdl/Infineon-BSC040N10NS5-DS-v02_00-EN.pdf?fileId=5546d4624a0bf290014a0fbcee2e6b38&src-supplier=Avnet, ComponentLink5URL=http://www.infineon.com/dgdl/Infineon-BSC040N10NS5-DS-v02_00-EN.pdf?fileId=5546d4624a0bf290014a0fbcee2e6b38&src-supplier=Avnet, Drain to Source Voltage (Vdss)=100V, Element Configuration=Single, Fall Time=10ns, Halogen Free="Halogen Free", Lead Free="Contains Lead", Max Dual Supply Voltage=100V, Mount="Surface Mount", Number of Channels=1, Number of Pins=8, Packaging="Tape and Reel", Pricing 1="1=3,10000, 10=2,78200, 25=2,62480, 100=2,23650, 500=1,83750, 1000=1,75000 (USD)", Rds On Max=4mR, Rise Time=9ns, RoHS=Yes, RoHS Compliant=Yes, Stock 1=130, Supplier 1=Digi-Key, Turn-Off Delay Time=32ns, Turn-On Delay Time=13ns, Weight=0.01787oz
R1: library part R_CVc, "D11/CRCW0603-C 100 20K 1% ET1 / CRCW060320K0FKEAC", Case/Package=Molded, Manufacturer=Vishay, Manufacturer Part Number=CRCW060320K0FKEAC, Max Operating Temperature=155°C, Min Operating Temperature=-55°C, Power Rating=100mW, Resistance=20kR, Resistor Type="Thick Film", Supplier Part Number 1=541-3987-1-ND, Temperature Coefficient=100ppm/°C, Tolerance=1%, Category=Resistors, ComponentLink1Description=http://www.vishay.com/docs/28773/crcwce3.pdf?src-supplier=Digi-Key, ComponentLink1URL=http://www.vishay.com/docs/28773/crcwce3.pdf?src-supplier=Digi-Key, Contact Plating=Tin, Lead Free="Lead Free", Length=1.55mm, Mount="Surface Mount", Pricing 1="1=0,10000, 10=0,03600, 100=0,01450, 1000=0,00652, 2500=0,00566 (USD)", RoHS=Yes, RoHS Compliant=Yes, Stock 1=87681, Supplier 1=Digi-Key, Termination=Wraparound
R2: library part R_IREG//SS, "VISHAY - CRCW060360K4FKEA - SMD Chip Resistor, 0603 [1608 Metric], 60.4 kohm, CRCW e3 Series, 75 V, Thick Film, 100 mW", Case Code (Imperial)=0603, Case Code (Metric)=1608, Manufacturer=Vishay, Manufacturer Part Number=CRCW060360K4FKEA, Max Operating Temperature=155°C, Max Power Dissipation=100mW, Min Operating Temperature=-55°C, Package Quantity=10, Resistance=60.4kR, Resistance Tolerance=1%, Resistor Type="Thick Film", Supplier Part Number 1=541-60.4KHCT-ND, Temperature Coefficient=100ppm/°C, Voltage Rating=75V, Case/Package=0603, Category=Resistors, ComponentLink10Description=https://datasheet.ciiva.com/3257/dcrcwe3-3257786.pdf?src-supplier=Avnet, ComponentLink10URL=https://datasheet.ciiva.com/3257/dcrcwe3-3257786.pdf?src-supplier=Avnet, ComponentLink11Description=https://datasheet.ciiva.com/22676/1847332-22676330.pdf?src-supplier=Element14, ComponentLink11URL=https://datasheet.ciiva.com/22676/1847332-22676330.pdf?src-supplier=Element14, ComponentLink12Description=https://datasheet.ciiva.com/3257/dcrcwe3-3257787.pdf?src-supplier=Avnet, ComponentLink12URL=https://datasheet.ciiva.com/3257/dcrcwe3-3257787.pdf?src-supplier=Avnet, ComponentLink1Description=https://datasheet.ciiva.com/11809/0900766b80d98afc-11809685.pdf?src-supplier=RSComponents, ComponentLink1URL=https://datasheet.ciiva.com/11809/0900766b80d98afc-11809685.pdf?src-supplier=RSComponents, ComponentLink2Description=https://datasheet.ciiva.com/7816/1697337-7816053.pdf?src-supplier=Element14, ComponentLink2URL=https://datasheet.ciiva.com/7816/1697337-7816053.pdf?src-supplier=Element14, ComponentLink3Description=https://datasheet.ciiva.com/2494/dcrcwe3-2494471.pdf?src-supplier=Digi-Key, ComponentLink3URL=https://datasheet.ciiva.com/2494/dcrcwe3-2494471.pdf?src-supplier=Digi-Key, ComponentLink4Description=https://datasheet.ciiva.com/16760/70201119-16760503.pdf?src-supplier=Allied+Electronics, ComponentLink4URL=https://datasheet.ciiva.com/16760/70201119-16760503.pdf?src-supplier=Allied+Electronics, ComponentLink5Description=https://datasheet.ciiva.com/2494/dcrcwe3-2494472.pdf?src-supplier=Digi-Key, ComponentLink5URL=https://datasheet.ciiva.com/2494/dcrcwe3-2494472.pdf?src-supplier=Digi-Key, ComponentLink6Description=https://datasheet.ciiva.com/16391/dcrcwe3-16391304.pdf?src-supplier=Future+Electronics, ComponentLink6URL=https://datasheet.ciiva.com/16391/dcrcwe3-16391304.pdf?src-supplier=Future+Electronics, ComponentLink7Description=https://datasheet.ciiva.com/16893/dcrcwe3-16893592.pdf?src-supplier=Avnet+Europe, ComponentLink7URL=https://datasheet.ciiva.com/16893/dcrcwe3-16893592.pdf?src-supplier=Avnet+Europe, ComponentLink8Description=https://datasheet.ciiva.com/2494/dcrcwe3-2494473.pdf?src-supplier=Digi-Key, ComponentLink8URL=https://datasheet.ciiva.com/2494/dcrcwe3-2494473.pdf?src-supplier=Digi-Key, ComponentLink9Description=https://datasheet.ciiva.com/5545/dcrcwe3-109170-5545721.pdf?src-supplier=Mouser, ComponentLink9URL=https://datasheet.ciiva.com/5545/dcrcwe3-109170-5545721.pdf?src-supplier=Mouser, Construction=Rectangular, Contact Plating=Tin, Depth=0.85mm, Features="Automotive AEC-Q200", Height=0.45mm, Lead Free="Lead Free", Length=1.55mm, Military Standard=Not, Number of Terminations=2, Packaging="Tape and Reel", Power Rating=100mW, Pricing 1="1=0,10000, 10=0,03600, 100=0,01450, 1000=0,00652, 2500=0,00566 (USD)", Radiation Hardening=No, REACH SVHC=Unknown, RoHS=Yes, RoHS Compliant=Yes, Series=CRCW, Size Code=0603, Stock 1=3660, Supplier 1=Digi-Key, Technology="THICK FILM", Termination=SMD/SMT, Tolerance=1%, Voltage Rating (DC)=75V, Weight=7.1E-05oz, Width=0.033inch
R3: library part R_FB1, "Res Thick Film 0603 48.7K Ohm 1% 0.1W(1/10W) ±100ppm/C Pad SMD Automotive T/R / CRCW060348K7FKEA", Case Code (Imperial)=0603, Case Code (Metric)=1608, Manufacturer=Vishay, Manufacturer Part Number=CRCW060348K7FKEA, Max Operating Temperature=155°C, Max Power Dissipation=100mW, Min Operating Temperature=-55°C, Package Quantity=10, Resistance=48.7kR, Resistance Tolerance=1%, Resistor Type="Thick Film", Supplier Part Number 1=541-48.7KHCT-ND, Temperature Coefficient=100ppm/°C, Voltage Rating=75V, Case/Package=0603, Category=Resistors, ComponentLink10Description=https://datasheet.ciiva.com/5551/dcrcwe3-109170-5551868.pdf?src-supplier=Mouser, ComponentLink10URL=https://datasheet.ciiva.com/5551/dcrcwe3-109170-5551868.pdf?src-supplier=Mouser, ComponentLink11Description=https://datasheet.ciiva.com/3257/dcrcwe3-3257645.pdf?src-supplier=Avnet, ComponentLink11URL=https://datasheet.ciiva.com/3257/dcrcwe3-3257645.pdf?src-supplier=Avnet, ComponentLink12Description=https://datasheet.ciiva.com/22705/1697337-22705853.pdf?src-supplier=Element14, ComponentLink12URL=https://datasheet.ciiva.com/22705/1697337-22705853.pdf?src-supplier=Element14, ComponentLink13Description=https://datasheet.ciiva.com/2466/dcrcwe3-2466287.pdf?src-supplier=Digi-Key, ComponentLink13URL=https://datasheet.ciiva.com/2466/dcrcwe3-2466287.pdf?src-supplier=Digi-Key, ComponentLink1Description=https://datasheet.ciiva.com/3882/41397335s9853079n6892-3882805.pdf?src-supplier=Arrow+Electronics, ComponentLink1URL=https://datasheet.ciiva.com/3882/41397335s9853079n6892-3882805.pdf?src-supplier=Arrow+Electronics, ComponentLink2Description=https://datasheet.ciiva.com/11809/0900766b80d98afc-11809590.pdf?src-supplier=RSComponents, ComponentLink2URL=https://datasheet.ciiva.com/11809/0900766b80d98afc-11809590.pdf?src-supplier=RSComponents, ComponentLink3Description=https://datasheet.ciiva.com/2466/dcrcwe3-2466288.pdf?src-supplier=Digi-Key, ComponentLink3URL=https://datasheet.ciiva.com/2466/dcrcwe3-2466288.pdf?src-supplier=Digi-Key, ComponentLink4Description=https://datasheet.ciiva.com/2466/dcrcwe3-2466289.pdf?src-supplier=Digi-Key, ComponentLink4URL=https://datasheet.ciiva.com/2466/dcrcwe3-2466289.pdf?src-supplier=Digi-Key, ComponentLink5Description=https://datasheet.ciiva.com/16781/70201119-16781510.pdf?src-supplier=Allied+Electronics, ComponentLink5URL=https://datasheet.ciiva.com/16781/70201119-16781510.pdf?src-supplier=Allied+Electronics, ComponentLink6Description=https://datasheet.ciiva.com/7816/1697337-7816039.pdf?src-supplier=Element14, ComponentLink6URL=https://datasheet.ciiva.com/7816/1697337-7816039.pdf?src-supplier=Element14, ComponentLink7Description=https://datasheet.ciiva.com/16449/dcrcwe3-16449495.pdf?src-supplier=Future+Electronics, ComponentLink7URL=https://datasheet.ciiva.com/16449/dcrcwe3-16449495.pdf?src-supplier=Future+Electronics, ComponentLink8Description=https://datasheet.ciiva.com/7816/1697337-7816040.pdf?src-supplier=Element14, ComponentLink8URL=https://datasheet.ciiva.com/7816/1697337-7816040.pdf?src-supplier=Element14, ComponentLink9Description=https://datasheet.ciiva.com/16884/dcrcwe3-16884570.pdf?src-supplier=Avnet+Europe, ComponentLink9URL=https://datasheet.ciiva.com/16884/dcrcwe3-16884570.pdf?src-supplier=Avnet+Europe, Construction=Rectangular, Contact Plating=Tin, Depth=0.85mm, Features="Automotive AEC-Q200", Height=0.45mm, Length=1.55mm, Military Standard=Not, Number of Pins=2, Number of Terminations=2, Packaging="Tape and Reel", Power Rating=100mW, Pricing 1="1=0,10000, 10=0,03600, 100=0,01450, 1000=0,00652, 2500=0,00566 (USD)", Radiation Hardening=No, REACH SVHC=Unknown, RoHS=Yes, RoHS Compliant=Yes, Series=CRCW, Size Code=0603, Stock 1=2623, Supplier 1=Digi-Key, Technology="THICK FILM", Termination=SMD/SMT, Tolerance=1%, Weight=7.1E-05oz, Width=0.033inch
R4: library part R_DCM, "Vishay CRCW Series Thick Film Surface Mount Resistor 0603 Case 9.76k 1% 0.1W 100ppm/K / CRCW06039K76FKEA", Case Code (Imperial)=0603, Case Code (Metric)=1608, Manufacturer=Vishay, Manufacturer Part Number=CRCW06039K76FKEA, Max Operating Temperature=155°C, Max Power Dissipation=100mW, Min Operating Temperature=-55°C, Package Quantity=10, Resistance=9.76kR, Resistance Tolerance=1%, Resistor Type="Thick Film", Supplier Part Number 1=541-9.76KHCT-ND, Temperature Coefficient=100ppm/°C, Voltage Rating=75V, Case/Package=0603, Category="Chip SMD Resistors", ComponentLink1Description=https://datasheet.ciiva.com/22872/70201119-22872343.pdf?src-supplier=Allied+Electronics, ComponentLink1URL=https://datasheet.ciiva.com/22872/70201119-22872343.pdf?src-supplier=Allied+Electronics, ComponentLink2Description=https://datasheet.ciiva.com/7792/125364-7792443.pdf?src-supplier=Element14, ComponentLink2URL=https://datasheet.ciiva.com/7792/125364-7792443.pdf?src-supplier=Element14, ComponentLink3Description=https://datasheet.ciiva.com/2466/dcrcwe3-2466253.pdf?src-supplier=Digi-Key, ComponentLink3URL=https://datasheet.ciiva.com/2466/dcrcwe3-2466253.pdf?src-supplier=Digi-Key, ComponentLink4Description=https://datasheet.ciiva.com/7673/1697337-7673325.pdf?src-supplier=Element14, ComponentLink4URL=https://datasheet.ciiva.com/7673/1697337-7673325.pdf?src-supplier=Element14, ComponentLink5Description=https://datasheet.ciiva.com/7673/1697337-7673326.pdf?src-supplier=Element14, ComponentLink5URL=https://datasheet.ciiva.com/7673/1697337-7673326.pdf?src-supplier=Element14, ComponentLink6Description=https://datasheet.ciiva.com/22702/1697337-22702901.pdf?src-supplier=Element14, ComponentLink6URL=https://datasheet.ciiva.com/22702/1697337-22702901.pdf?src-supplier=Element14, ComponentLink7Description=https://datasheet.ciiva.com/5541/dcrcwe3-109170-5541193.pdf?src-supplier=Mouser, ComponentLink7URL=https://datasheet.ciiva.com/5541/dcrcwe3-109170-5541193.pdf?src-supplier=Mouser, ComponentLink8Description=https://datasheet.ciiva.com/2466/dcrcwe3-2466251.pdf?src-supplier=Digi-Key, ComponentLink8URL=https://datasheet.ciiva.com/2466/dcrcwe3-2466251.pdf?src-supplier=Digi-Key, ComponentLink9Description=https://datasheet.ciiva.com/2466/dcrcwe3-2466252.pdf?src-supplier=Digi-Key, ComponentLink9URL=https://datasheet.ciiva.com/2466/dcrcwe3-2466252.pdf?src-supplier=Digi-Key, Construction=Rectangular, Contact Plating=Tin, Depth=0.85mm, Features="Automotive AEC-Q200", Height=0.45mm, Lead Free="Lead Free", Length=1.55mm, Military Standard=Not, Number of Terminations=2, Packaging="Tape and Reel", Power Rating=100mW, Pricing 1="1=0,10000, 10=0,03600, 100=0,01450, 1000=0,00652, 2500=0,00566 (USD)", Radiation Hardening=No, REACH SVHC=Unknown, RoHS=Yes, RoHS Compliant=Yes, Series=CRCW, Size Code=0603, Stock 1=4468, Supplier 1=Digi-Key, Technology="THICK FILM", Termination=SMD/SMT, Tolerance=1%, Voltage Rating (DC)=75V, Weight=7.1E-05oz, Width=0.85mm